# Altium PCB PCB_prob_2024-08-29.pcbdoc
Units mm, origin at the board's own origin, x right, y up, seen from the top; angles counter-clockwise.
Board outline 271.78 x 136.72 mm, 2 copper layers (Top Layer, Bottom Layer); 57 components, 34 nets, 213 pads, 5 vias.
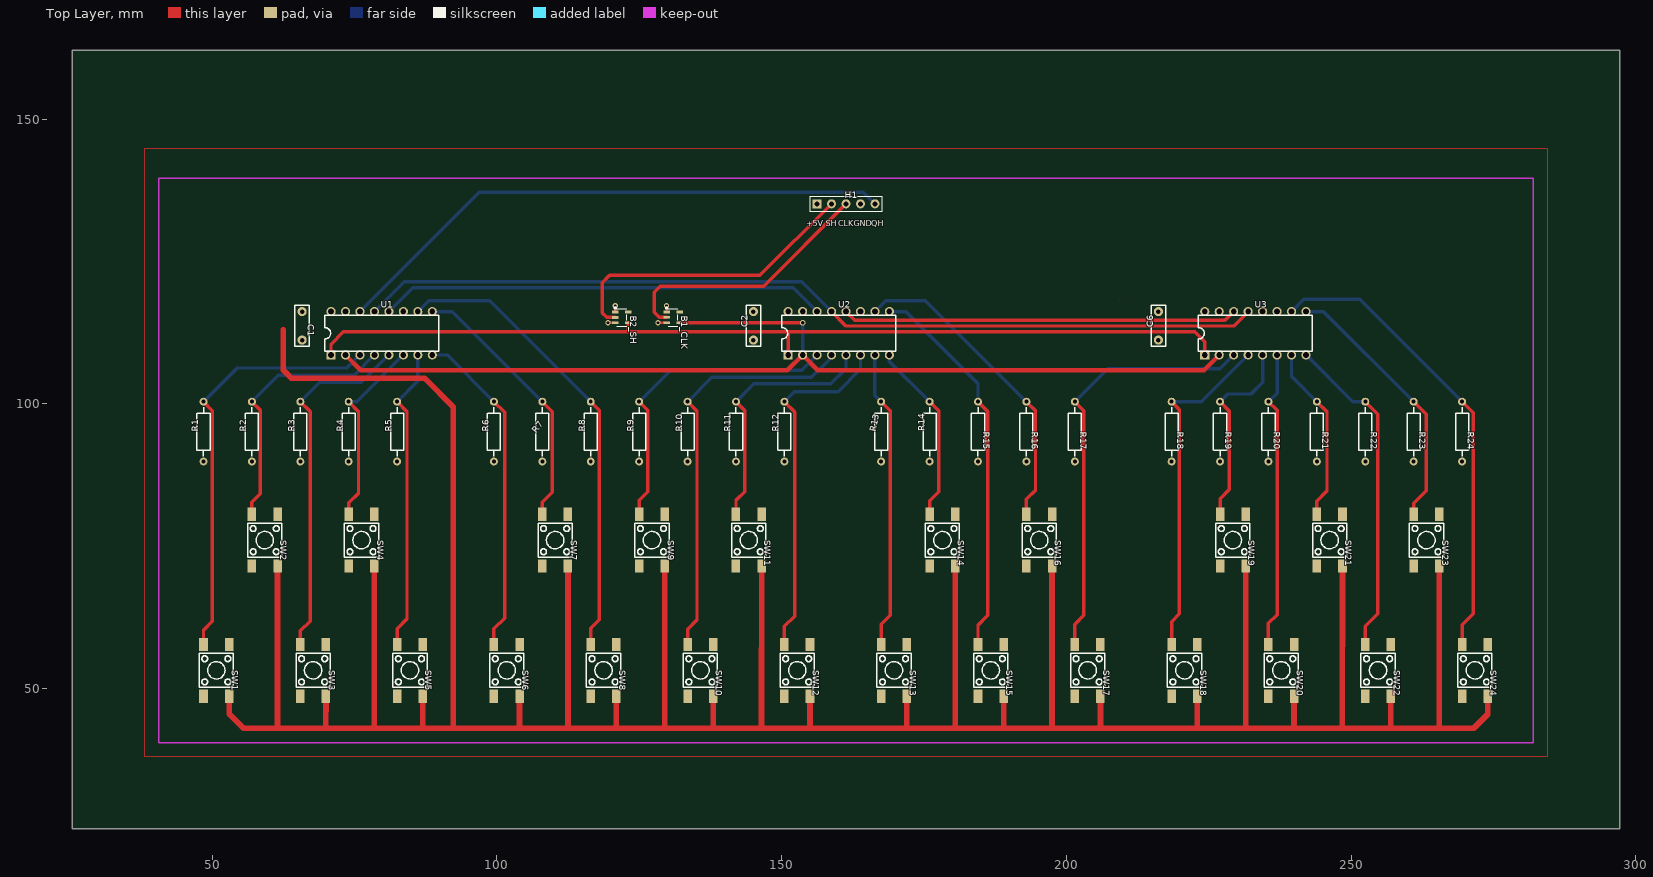
[diagram p0: Top Layer view]
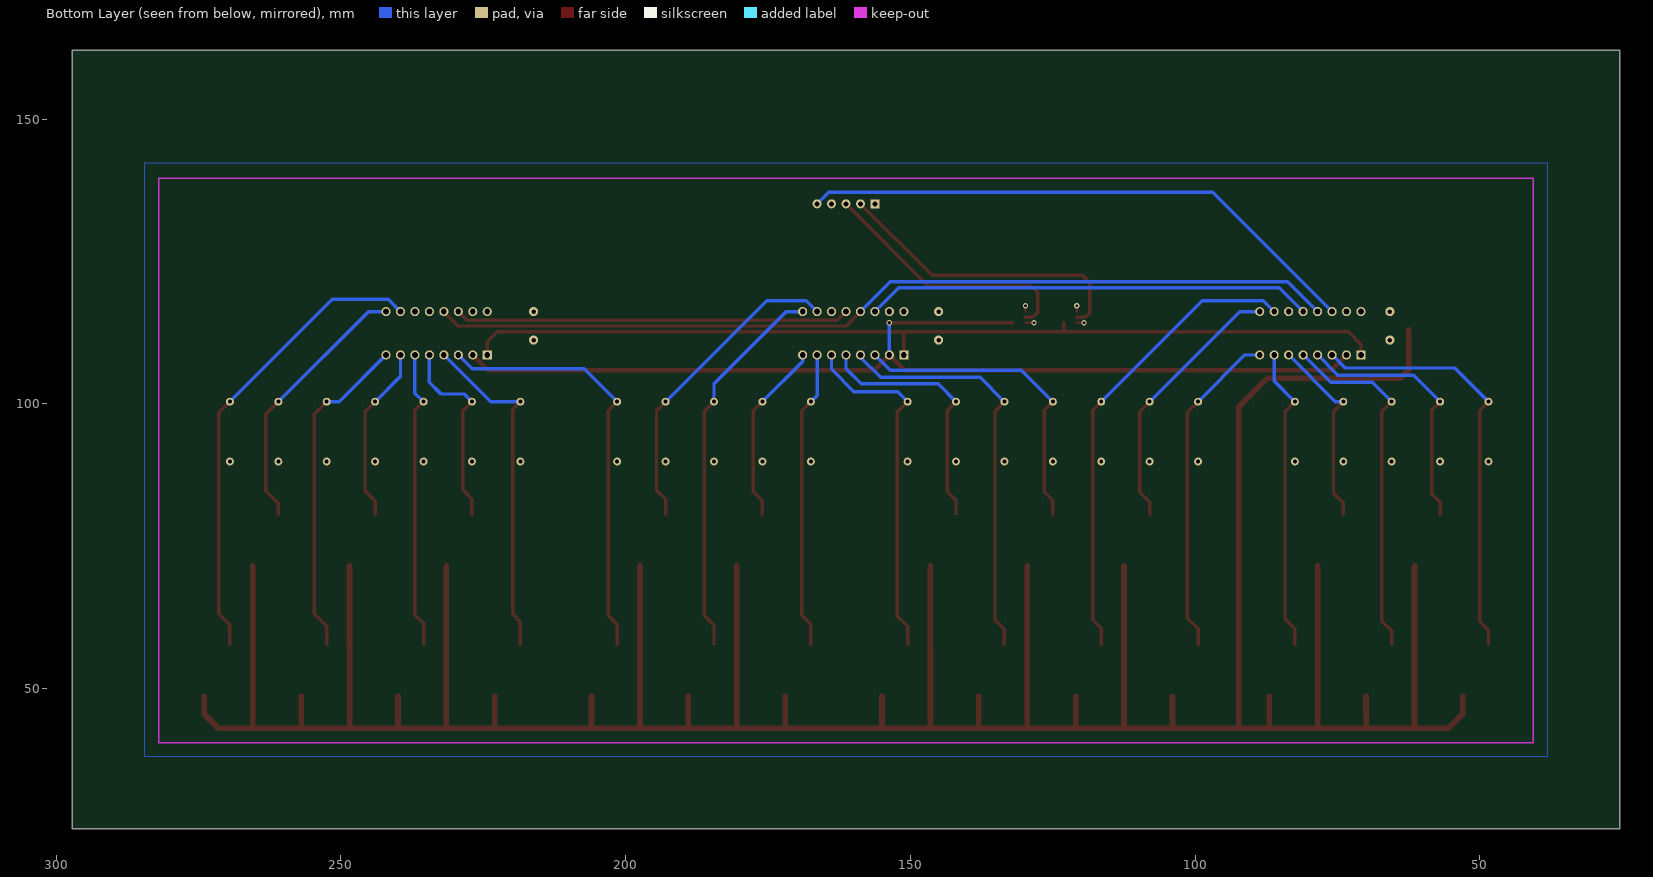
[diagram p1: Bottom Layer view, seen from below]

## Layer stack, top to bottom
Top Layer: signal copper (thickness not stored)
Dielectric: dielectric 0.32, FR-4, Dk 4.8
Bottom Layer: signal copper (thickness not stored)

## Board outline
297.18,25.4 25.4,25.4 25.4,162.115 297.18,162.115

## Components (designator, comment, footprint, x,y, rotation, side; value= is the part's Value field where it differs from the comment)
B1_CLK "SN74LVC1G125DBVR" SOT-23-5_L3.0-W1.7-P0.95-LS2.8-BL 130.937,115.189 r270 top
B2_SH "SN74LVC1G125DBVR" SOT-23-5_L3.0-W1.7-P0.95-LS2.8-BL 121.92,115.189 r270 top
C1 "100nF" CAP-TH_L7.2-W2.5-P5.00-D0.5 65.786,113.705 r270 top
C2 "100nF" CAP-TH_L7.2-W2.5-P5.00-D0.5 145.034,113.705 r90 top
C6 "100nF" CAP-TH_L7.2-W2.5-P5.00-D0.5 216.154,113.705 r90 top
H1 "HDR-F-2.54_1x5" HDR-F-2.54_1X5 161.29,135.128 r0 top
R1 "110kΩ" RES-TH_BD2.3-L6.5-P10.50-D0.5 48.47,95.123 r90 top
R2 "110kΩ" RES-TH_BD2.3-L6.5-P10.50-D0.5 56.97,95.123 r90 top
R3 "110kΩ" RES-TH_BD2.3-L6.5-P10.50-D0.5 65.47,95.123 r90 top
R4 "110kΩ" RES-TH_BD2.3-L6.5-P10.50-D0.5 73.97,95.123 r90 top
R5 "110kΩ" RES-TH_BD2.3-L6.5-P10.50-D0.5 82.47,95.123 r90 top
R6 "110kΩ" RES-TH_BD2.3-L6.5-P10.50-D0.5 99.47,95.123 r90 top
R7 "110kΩ" RES-TH_BD2.3-L6.5-P10.50-D0.5 107.97,95.123 r90 top
R8 "110kΩ" RES-TH_BD2.3-L6.5-P10.50-D0.5 116.47,95.123 r90 top
R9 "110kΩ" RES-TH_BD2.3-L6.5-P10.50-D0.5 124.97,95.123 r270 top
R10 "110kΩ" RES-TH_BD2.3-L6.5-P10.50-D0.5 133.47,95.123 r270 top
R11 "110kΩ" RES-TH_BD2.3-L6.5-P10.50-D0.5 141.97,95.123 r270 top
R12 "110kΩ" RES-TH_BD2.3-L6.5-P10.50-D0.5 150.47,95.123 r270 top
R13 "110kΩ" RES-TH_BD2.3-L6.5-P10.50-D0.5 167.47,95.123 r270 top
R14 "110kΩ" RES-TH_BD2.3-L6.5-P10.50-D0.5 175.97,95.123 r270 top
R15 "110kΩ" RES-TH_BD2.3-L6.5-P10.50-D0.5 184.47,95.123 r270 top
R16 "110kΩ" RES-TH_BD2.3-L6.5-P10.50-D0.5 192.97,95.123 r270 top
R17 "110kΩ" RES-TH_BD2.3-L6.5-P10.50-D0.5 201.47,95.123 r270 top
R18 "110kΩ" RES-TH_BD2.3-L6.5-P10.50-D0.5 218.47,95.123 r270 top
R19 "110kΩ" RES-TH_BD2.3-L6.5-P10.50-D0.5 226.97,95.123 r270 top
R20 "110kΩ" RES-TH_BD2.3-L6.5-P10.50-D0.5 235.47,95.123 r270 top
R21 "110kΩ" RES-TH_BD2.3-L6.5-P10.50-D0.5 243.97,95.123 r270 top
R22 "110kΩ" RES-TH_BD2.3-L6.5-P10.50-D0.5 252.47,95.123 r270 top
R23 "110kΩ" RES-TH_BD2.3-L6.5-P10.50-D0.5 260.969,95.123 r270 top
R24 "110kΩ" RES-TH_BD2.3-L6.5-P10.50-D0.5 269.47,95.123 r270 top
SW1 "SW" SW-SMD_4P-L6.0-W6.0-P4.50-LS9.0-2 50.72,53.213 r270 top
SW2 "SW" SW-SMD_4P-L6.0-W6.0-P4.50-LS9.0-2 59.22,76.073 r270 top
SW3 "SW" SW-SMD_4P-L6.0-W6.0-P4.50-LS9.0-2 67.72,53.213 r270 top
SW4 "SW" SW-SMD_4P-L6.0-W6.0-P4.50-LS9.0-2 76.22,76.073 r270 top
SW5 "SW" SW-SMD_4P-L6.0-W6.0-P4.50-LS9.0-2 84.72,53.213 r270 top
SW6 "SW" SW-SMD_4P-L6.0-W6.0-P4.50-LS9.0-2 101.72,53.213 r270 top
SW7 "SW" SW-SMD_4P-L6.0-W6.0-P4.50-LS9.0-2 110.22,76.073 r270 top
SW8 "SW" SW-SMD_4P-L6.0-W6.0-P4.50-LS9.0-2 118.72,53.213 r270 top
SW9 "SW" SW-SMD_4P-L6.0-W6.0-P4.50-LS9.0-2 127.22,76.073 r270 top
SW10 "SW" SW-SMD_4P-L6.0-W6.0-P4.50-LS9.0-2 135.72,53.213 r270 top
SW11 "SW" SW-SMD_4P-L6.0-W6.0-P4.50-LS9.0-2 144.22,76.073 r270 top
SW12 "SW" SW-SMD_4P-L6.0-W6.0-P4.50-LS9.0-2 152.72,53.213 r270 top
SW13 "SW" SW-SMD_4P-L6.0-W6.0-P4.50-LS9.0-2 169.72,53.213 r270 top
SW14 "SW" SW-SMD_4P-L6.0-W6.0-P4.50-LS9.0-2 178.22,76.073 r270 top
SW15 "SW" SW-SMD_4P-L6.0-W6.0-P4.50-LS9.0-2 186.72,53.213 r270 top
SW16 "SW" SW-SMD_4P-L6.0-W6.0-P4.50-LS9.0-2 195.22,76.073 r270 top
SW17 "SW" SW-SMD_4P-L6.0-W6.0-P4.50-LS9.0-2 203.72,53.213 r270 top
SW18 "SW" SW-SMD_4P-L6.0-W6.0-P4.50-LS9.0-2 220.72,53.213 r270 top
SW19 "SW" SW-SMD_4P-L6.0-W6.0-P4.50-LS9.0-2 229.22,76.073 r270 top
SW20 "SW" SW-SMD_4P-L6.0-W6.0-P4.50-LS9.0-2 237.72,53.213 r270 top
SW21 "SW" SW-SMD_4P-L6.0-W6.0-P4.50-LS9.0-2 246.22,76.073 r270 top
SW22 "SW" SW-SMD_4P-L6.0-W6.0-P4.50-LS9.0-2 254.72,53.213 r270 top
SW23 "SW" SW-SMD_4P-L6.0-W6.0-P4.50-LS9.0-2 263.22,76.073 r270 top
SW24 "SW" SW-SMD_4P-L6.0-W6.0-P4.50-LS9.0-2 271.72,53.213 r270 top
U1 "SN74HC165N" DIP-16_L19.8-W6.5-P2.54-LS7.6-BL 79.756,112.395 r0 top
U2 "SN74HC165N" DIP-16_L19.8-W6.5-P2.54-LS7.6-BL 160.02,112.395 r0 top
U3 "SN74HC165N" DIP-16_L19.8-W6.5-P2.54-LS7.6-BL 233.172,112.395 r0 top

## Footprints (in the part's own frame and the unit in brackets; to place one, negate y for a bottom-side part, rotate by r counter-clockwise, add the part's x,y. Pads: shape width x height; smd on the part's side, far side on the other; paste and mask are expansions set on the pad)
CAP-TH_L7.2-W2.5-P5.00-D0.5 [mm]
  round 1.6 hole 0.8 paste+0 mask+0.05: 1(-2.5,0) 2(2.5,0)
  silkscreen extent -3.6,-1.25 3.6,1.25
DIP-16_L19.8-W6.5-P2.54-LS7.6-BL [mm]
  rect 1.6x1.6 hole 1 paste+0 mask+0.051: 1(-8.89,-3.81)
  round 1.6 hole 1 paste+0 mask+0.051: 2(-6.35,-3.81) 3(-3.81,-3.81) 4(-1.27,-3.81) 5(1.27,-3.81) 6(3.81,-3.81) 7(6.35,-3.81) 8(8.89,-3.81) 9(8.89,3.81) 10(6.35,3.81) 11(3.81,3.81) 12(1.27,3.81) 13(-1.27,3.81) 14(-3.81,3.81) 15(-6.35,3.81) 16(-8.89,3.81)
  silkscreen extent -10,-3.2 10,3.2
HDR-F-2.54_1X5 [mil]
  rect 62x62 hole 35 paste+0 mask+2: 1(-200,0)
  round 62 hole 35 paste+0 mask+2: 2(-100,0) 3(0,0) 4(100,0) 5(200,0)
  silkscreen extent -250,-50 250,50
RES-TH_BD2.3-L6.5-P10.50-D0.5 [mm]
  round 1.4 hole 0.7 paste+0 mask+0.051: 1(-5.25,0) 2(5.25,0)
  silkscreen extent -4.32,-1.15 4.32,1.15
SOT-23-5_L3.0-W1.7-P0.95-LS2.8-BL [mm]
  rect 0.49x1.157 smd paste+0 mask+0.051: 1(-0.95,-1.154) 2(0,-1.154) 3(0.95,-1.154)
  rect 0.49x1.175 smd paste+0 mask+0.051: 4(0.95,1.154) 5(-0.95,1.154)
  silkscreen extent -1.8,-1.29 1.53,0.85
SW-SMD_4P-L6.0-W6.0-P4.50-LS9.0-2 [mm]
  rect 2.3x1.5 smd paste+0 mask+0.051: 1(-4.55,2.25) 2(4.55,2.25) 3(-4.55,-2.25) 4(4.55,-2.25)
  silkscreen extent -3,-3 3,3

## Via types
v1: diameter 0.9, hole 0.5, Top Layer to Bottom Layer, tented both sides, 4 vias
v2: diameter 1, hole 0.6, Top Layer to Bottom Layer, tented both sides, 1 vias

## Nets (pads, with @x,y where several pads share a name; then routed paths per layer and width w, separated by ;. In a path a pad name is that pad's centre, name@x,y a point inside that pad or via, vN(x,y) a via of type N, cw(c..) or ccw(c..) an arc to the next point about the centre after c; other vN are vias at no path point)
CLK: B1_CLK.2 H1.3 | length 46.1
  Top Layer w0.6: B1_CLK.2 128.524,115.189 127.635,116.078 127.635,119.634 128.651,120.65 146.812,120.65 H1.3
CLK_OUT: B1_CLK.4 U1.2 U2.2 U3.2 | length 185.1
  Top Layer w0.6: B1_CLK.4 v2(153.67,114.239)
  Top Layer w0.8: U1.2 76.073,105.918 151.003,105.918 U2.2 156.337,105.918 224.155,105.918 U3.2
  Bottom Layer w0.6: U2.2 v2(153.67,114.239)
GND_PORT: B1_CLK.1 B1_CLK.3 B2_SH.1 B2_SH.3 C1.2 C2.1 C6.1 H1.4 R1.1 R2.1 R3.1 R4.1 R5.1 R6.1 R7.1 R8.1 R9.2 R10.2 R11.2 R12.2 R13.2 R14.2 R15.2 R16.2 R17.2 R18.2 R19.2 R20.2 R21.2 R22.2 R23.2 R24.2 U1.11 U1.15 U2.11 U2.15 U3.11 U3.15 | length 4.9
  Top Layer w0.4: v1(119.507,114.239) B2_SH.3 ; B2_SH.1 v1(120.777,117.221) ; v1(128.27,114.239) B1_CLK.3 ; B1_CLK.1 v1(129.794,117.221)
QH: H1.5 U1.14 | length 99.9
  Bottom Layer w0.6: U1.14 96.901,137.16 164.338,137.16 H1.5
QH#: U1.13 U2.13 U3.13 | length 159.8
  Top Layer w0.6: U2.13 161.29,113.665 229.362,113.665 U3.13
  Bottom Layer w0.6: U1.13 83.693,121.412 153.543,121.412 U2.13
SH/LD#: B2_SH.2 H1.2 | length 53.9
  Top Layer w0.6: B2_SH.2 119.253,115.189 118.491,115.951 118.491,121.285 119.761,122.555 146.177,122.555 H1.2
SH/LD#_OUT: B2_SH.4 U1.1 U2.1 U3.1 | length 164.9
  Top Layer w0.6: U1.1 70.866,110.49 73.025,112.649 123.073,112.649 ; B2_SH.4 123.073,112.649 ; U2.1 151.13,112.649 ; U3.1 224.282,110.871 222.504,112.649 151.13,112.649 ; 123.073,112.649 151.13,112.649
U1: R1.2 SW1.3 U1.3 | length 74.8
  Top Layer w0.6: SW1.3 48.47,60.281 50.038,61.849 50.038,98.805 R1.2
  Bottom Layer w0.6: R1.2 54.396,106.299 73.66,106.299 U1.3
U2: R2.2 SW2.3 U1.4 | length 45.9
  Top Layer w0.6: SW2.3 56.97,82.751 58.42,84.201 58.42,98.923 R2.2
  Bottom Layer w0.6: R2.2 61.626,105.029 74.93,105.029 U1.4
U2_14: U1.12 U2.14 | length 78.7
  Bottom Layer w0.6: U1.12 85.217,120.396 152.019,120.396 U2.14
U3: R3.2 SW3.3 U1.5 | length 63
  Top Layer w0.6: SW3.3@65.47,57.763 65.47,60.136 67.183,61.849 67.183,98.66 R3.2
  Bottom Layer w0.6: R3.2 68.856,103.759 76.2,103.759 U1.5
U3_14: U2.12 U3.14 | length 69.3
  Top Layer w0.6: U2.12 162.814,114.681 227.838,114.681 U3.14
U4: R4.2 SW4.3 U1.6 | length 34.2
  Top Layer w0.6: SW4.3 73.97,82.606 75.692,84.328 75.692,98.651 R4.2
  Bottom Layer w0.6: R4.2 75.354,100.373 U1.6
U5: R5.2 SW5.3 U1.7 | length 53.8
  Top Layer w0.6: SW5.3@82.471,57.762 82.471,60.5 84.201,62.23 84.201,98.641 R5.2@82.471,100.373
  Bottom Layer w0.6: R5.2@82.47,100.373 86.106,104.009 U1.7
U6: R6.2 SW6.3 U1.8 | length 58.4
  Top Layer w0.6: SW6.3 99.469,60.48 101.346,62.357 101.346,98.496 R6.2
  Bottom Layer w0.6: U1.8 91.258,108.585 R6.2
U7: R7.2 SW7.3 U1.9 | length 47.1
  Top Layer w0.6: SW7.3 107.97,82.697 109.728,84.455 109.728,98.615 R7.2
  Bottom Layer w0.6: U1.9 92.138,116.205 R7.2
U8: R8.2 SW8.3 U1.10 | length 82.4
  Top Layer w0.6: SW8.3 116.47,60.59 117.983,62.103 117.983,98.86 R8.2
  Bottom Layer w0.6: U1.10 88.011,118.11 98.733,118.11 R8.2
U9: R9.1 SW9.3 U2.3 | length 55.7
  Top Layer w0.6: SW9.3 124.97,83.06 126.492,84.582 126.492,98.851 R9.1
  Bottom Layer w0.6: R9.1 130.515,105.918 153.543,105.918 U2.3
U10: R10.1 SW10.3 U2.4 | length 72.9
  Top Layer w0.6: SW10.3 133.47,60.445 135.128,62.103 135.128,98.715 R10.1
  Bottom Layer w0.6: R10.1 137.745,104.648 155.194,104.648 158.75,108.204 U2.4
U11: R11.1 SW11.3 U2.5 | length 45.2
  Top Layer w0.6: SW11.3 141.97,83.042 143.51,84.582 143.51,98.833 R11.1
  Bottom Layer w0.6: R11.1 145.103,103.505 158.623,103.505 161.29,106.172 U2.5
U12: R12.1 SW12.3 U2.6 | length 62.4
  Top Layer w0.6: SW12.3 150.47,60.935 152.273,62.738 152.273,98.57 R12.1
  Bottom Layer w0.6: R12.1 152.204,102.108 159.893,102.108 163.83,106.045 U2.6
U13: R13.1 SW13.3 U2.7 | length 52.6
  Top Layer w0.6: SW13.3 167.47,61.298 169.037,62.865 169.037,98.806 R13.1
  Bottom Layer w0.6: U2.7 166.37,101.473 R13.1
U14: R14.1 SW14.3 U2.8 | length 32.2
  Top Layer w0.6: SW14.3 175.97,83.006 177.546,84.582 177.546,98.797 R14.1
  Bottom Layer w0.6: U2.8 168.91,107.433 R14.1
U15: R15.1 SW15.3 U2.9 | length 68
  Top Layer w0.6: SW15.3 184.47,61.153 186.182,62.865 186.182,98.661 R15.1
  Bottom Layer w0.6: U2.9 171.831,116.205 184.47,103.566 R15.1
U16: R16.1 SW16.3 U2.10 | length 55.8
  Top Layer w0.6: SW16.3 192.97,83.242 194.564,84.836 194.564,98.779 R16.1
  Bottom Layer w0.6: U2.10 168.275,118.11 175.232,118.11 R16.1
U17: R17.1 SW17.3 U3.3 | length 75.2
  Top Layer w0.6: SW17.3 201.47,61.262 203.073,62.865 203.073,98.77 R17.1
  Bottom Layer w0.6: R17.1 207.269,106.172 226.949,106.172 U3.3
U18: R18.1 SW18.3 U3.4 | length 60.6
  Top Layer w0.6: SW18.3 218.47,61.752 219.837,63.119 219.837,99.006 R18.1
  Bottom Layer w0.6: R18.1 223.69,100.373 U3.4
U19: R19.1 SW19.3 U3.5 | length 34.8
  Top Layer w0.6: SW19.3 226.97,83.333 228.6,84.963 228.6,98.742 R19.1
  Bottom Layer w0.6: R19.1 228.324,101.727 232.41,101.727 234.442,103.759 U3.5
U20: R20.1 SW20.3 U3.6 | length 52.7
  Top Layer w0.6: SW20.3 235.47,61.48 236.982,62.992 236.982,98.861 R20.1
  Bottom Layer w0.6: R20.1 236.982,101.885 U3.6
U21: R21.1 SW21.3 U3.7 | length 31.3
  Top Layer w0.6: SW21.3 243.969,82.933 245.745,84.709 245.745,98.597 R21.1
  Bottom Layer w0.6: U3.7 239.522,104.82 R21.1
U22: R22.1 SW22.3 U3.8 | length 58.2
  Top Layer w0.6: SW22.3 252.469,60.953 254.635,63.119 254.635,98.208 R22.1@252.47,100.373
  Bottom Layer w0.6: U3.8 250.274,100.373 R22.1@252.47,100.373
U23: R23.1 SW23.3 U3.9 | length 47
  Top Layer w0.6: SW23.3 260.969,82.534 263.144,84.709 263.144,98.198 R23.1
  Bottom Layer w0.6: U3.9 245.137,116.205 R23.1
U24: R24.1 SW24.3 U3.10 | length 82.5
  Top Layer w0.6: SW24.3 269.469,61.189 271.399,63.119 271.399,98.444 R24.1
  Bottom Layer w0.6: U3.10 241.681,118.364 251.478,118.364 R24.1
VCC_PORT: B1_CLK.5 B2_SH.5 C1.1 C2.2 C6.2 H1.1 SW1.2 SW2.2 SW3.2 SW4.2 SW5.2 SW6.2 SW7.2 SW8.2 SW9.2 SW10.2 SW11.2 SW12.2 SW13.2 SW14.2 SW15.2 SW16.2 SW17.2 SW18.2 SW19.2 SW20.2 SW21.2 SW22.2 SW23.2 SW24.2 U1.16 U2.16 U3.16 | length 677.4
  Top Layer w1: SW1.2 52.97,45.582 55.499,43.053 271.526,43.053 273.969,45.496 SW24.2 ; 61.465,43.053 SW2.2 ; 62.484,113.03 62.484,105.918 63.881,104.521 87.249,104.521 92.329,99.441 92.329,43.082 92.329,43.053 ; 69.954,43.053 SW3.2 ; SW4.2 78.48,43.053 ; 86.955,43.053 SW5.2 ; 103.958,43.053 SW6.2 ; 112.467,43.053 SW7.2 ; 120.971,43.053 SW8.2 ; SW9.2 129.482,43.053 ; 137.958,43.053 SW10.2 ; 146.449,43.053 SW11.2 ; 154.964,43.053 SW12.2 ; SW13.2 171.975,43.053 ; 180.463,43.053 SW14.2 ; SW15.2@188.97,48.663 188.975,43.053 ; SW16.2 197.473,43.053 ; 205.968,43.053 SW17.2 ; 222.964,43.053 SW18.2 ; 231.46,43.053 SW19.2 ; 239.967,43.053 SW20.2 ; 248.453,43.053 SW21.2 ; 256.963,43.053 SW22.2 ; 265.466,43.053 SW23.2@265.469,71.523
pads on no net: SW1.1 SW1.4 SW2.1 SW2.4 SW3.1 SW3.4 SW4.1 SW4.4 SW5.1 SW5.4 SW6.1 SW6.4 SW7.1 SW7.4 SW8.1 SW8.4 SW9.1 SW9.4 SW10.1 SW10.4 SW11.1 SW11.4 SW12.1 SW12.4 SW13.1 SW13.4 SW14.1 SW14.4 SW15.1 SW15.4 SW16.1 SW16.4 SW17.1 SW17.4 SW18.1 SW18.4 SW19.1 SW19.4 SW20.1 SW20.4 SW21.1 SW21.4 SW22.1 SW22.4 SW23.1 SW23.4 SW24.1 SW24.4 U3.12

## Polygon pours and split planes (outlines as drawn)
GND_PORT on Bottom Layer (solid): 38.1,38.1 38.1,142.24 284.48,142.24 284.48,38.1
VCC_PORT on Top Layer (solid): 236.347,149.415 236.347,112.459 236.22,112.459 60.071,112.459 59.817,112.712 59.817,149.415
GND_PORT on Top Layer (solid): 38.1,144.78 38.1,38.1 284.48,38.1 284.48,144.78

## Silkscreen, mask and mechanical layers (free items; w line width, h text height)
Top Overlay:
  text "+5V" at 154.305,131.199 h1
  text "SH" at 157.734,131.199 h1
  text "CLK" at 159.893,131.199 h1
  text "GND" at 162.687,131.199 h1
  text "QH" at 165.735,131.199 h1